# Altium PCB STM32-V5_PCB封装(PADS 2005).PcbDoc (part 1 of 2)
Units mil, origin at the board's own origin, x right, y up, seen from the top; angles counter-clockwise.
Board outline 7066.93 x 5511.81 mil, 2 copper layers (Top, BOTTOM), stack 4.02 mil thick; 397 components, 352 nets, 1643 pads, 387 vias.
Unrouted connection lines stored in the file: 1.
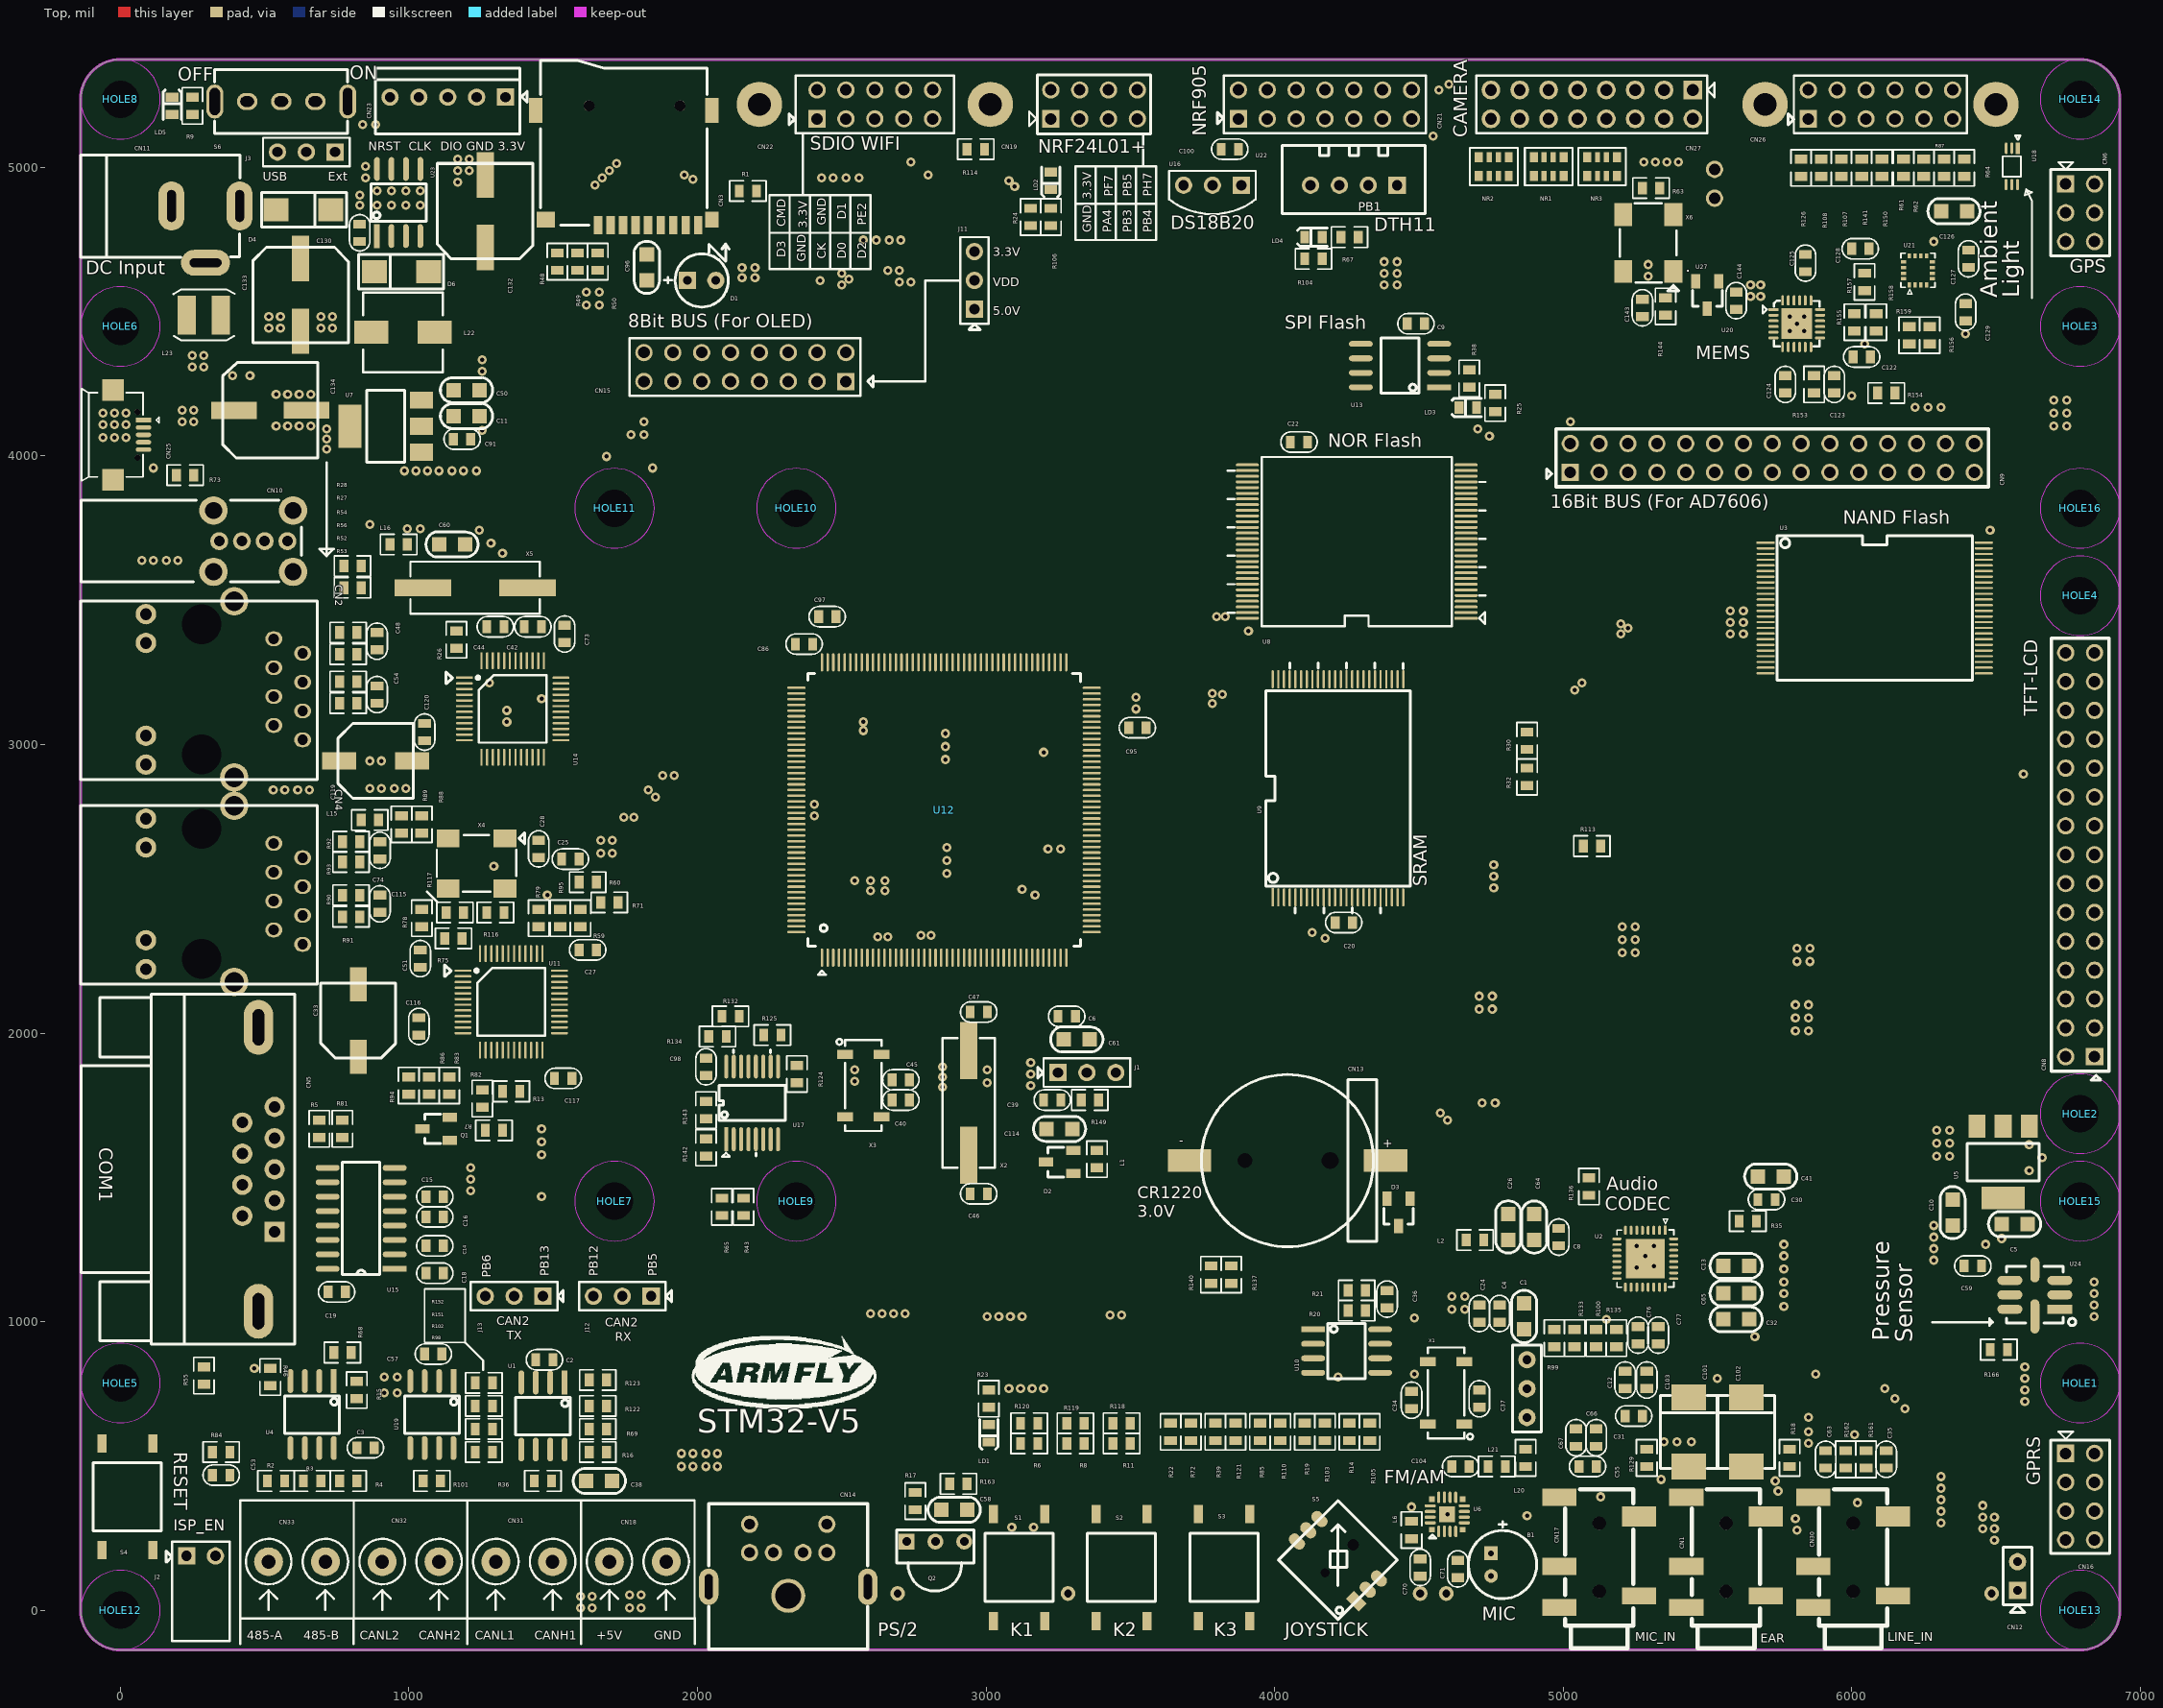
[diagram p0: Top view]
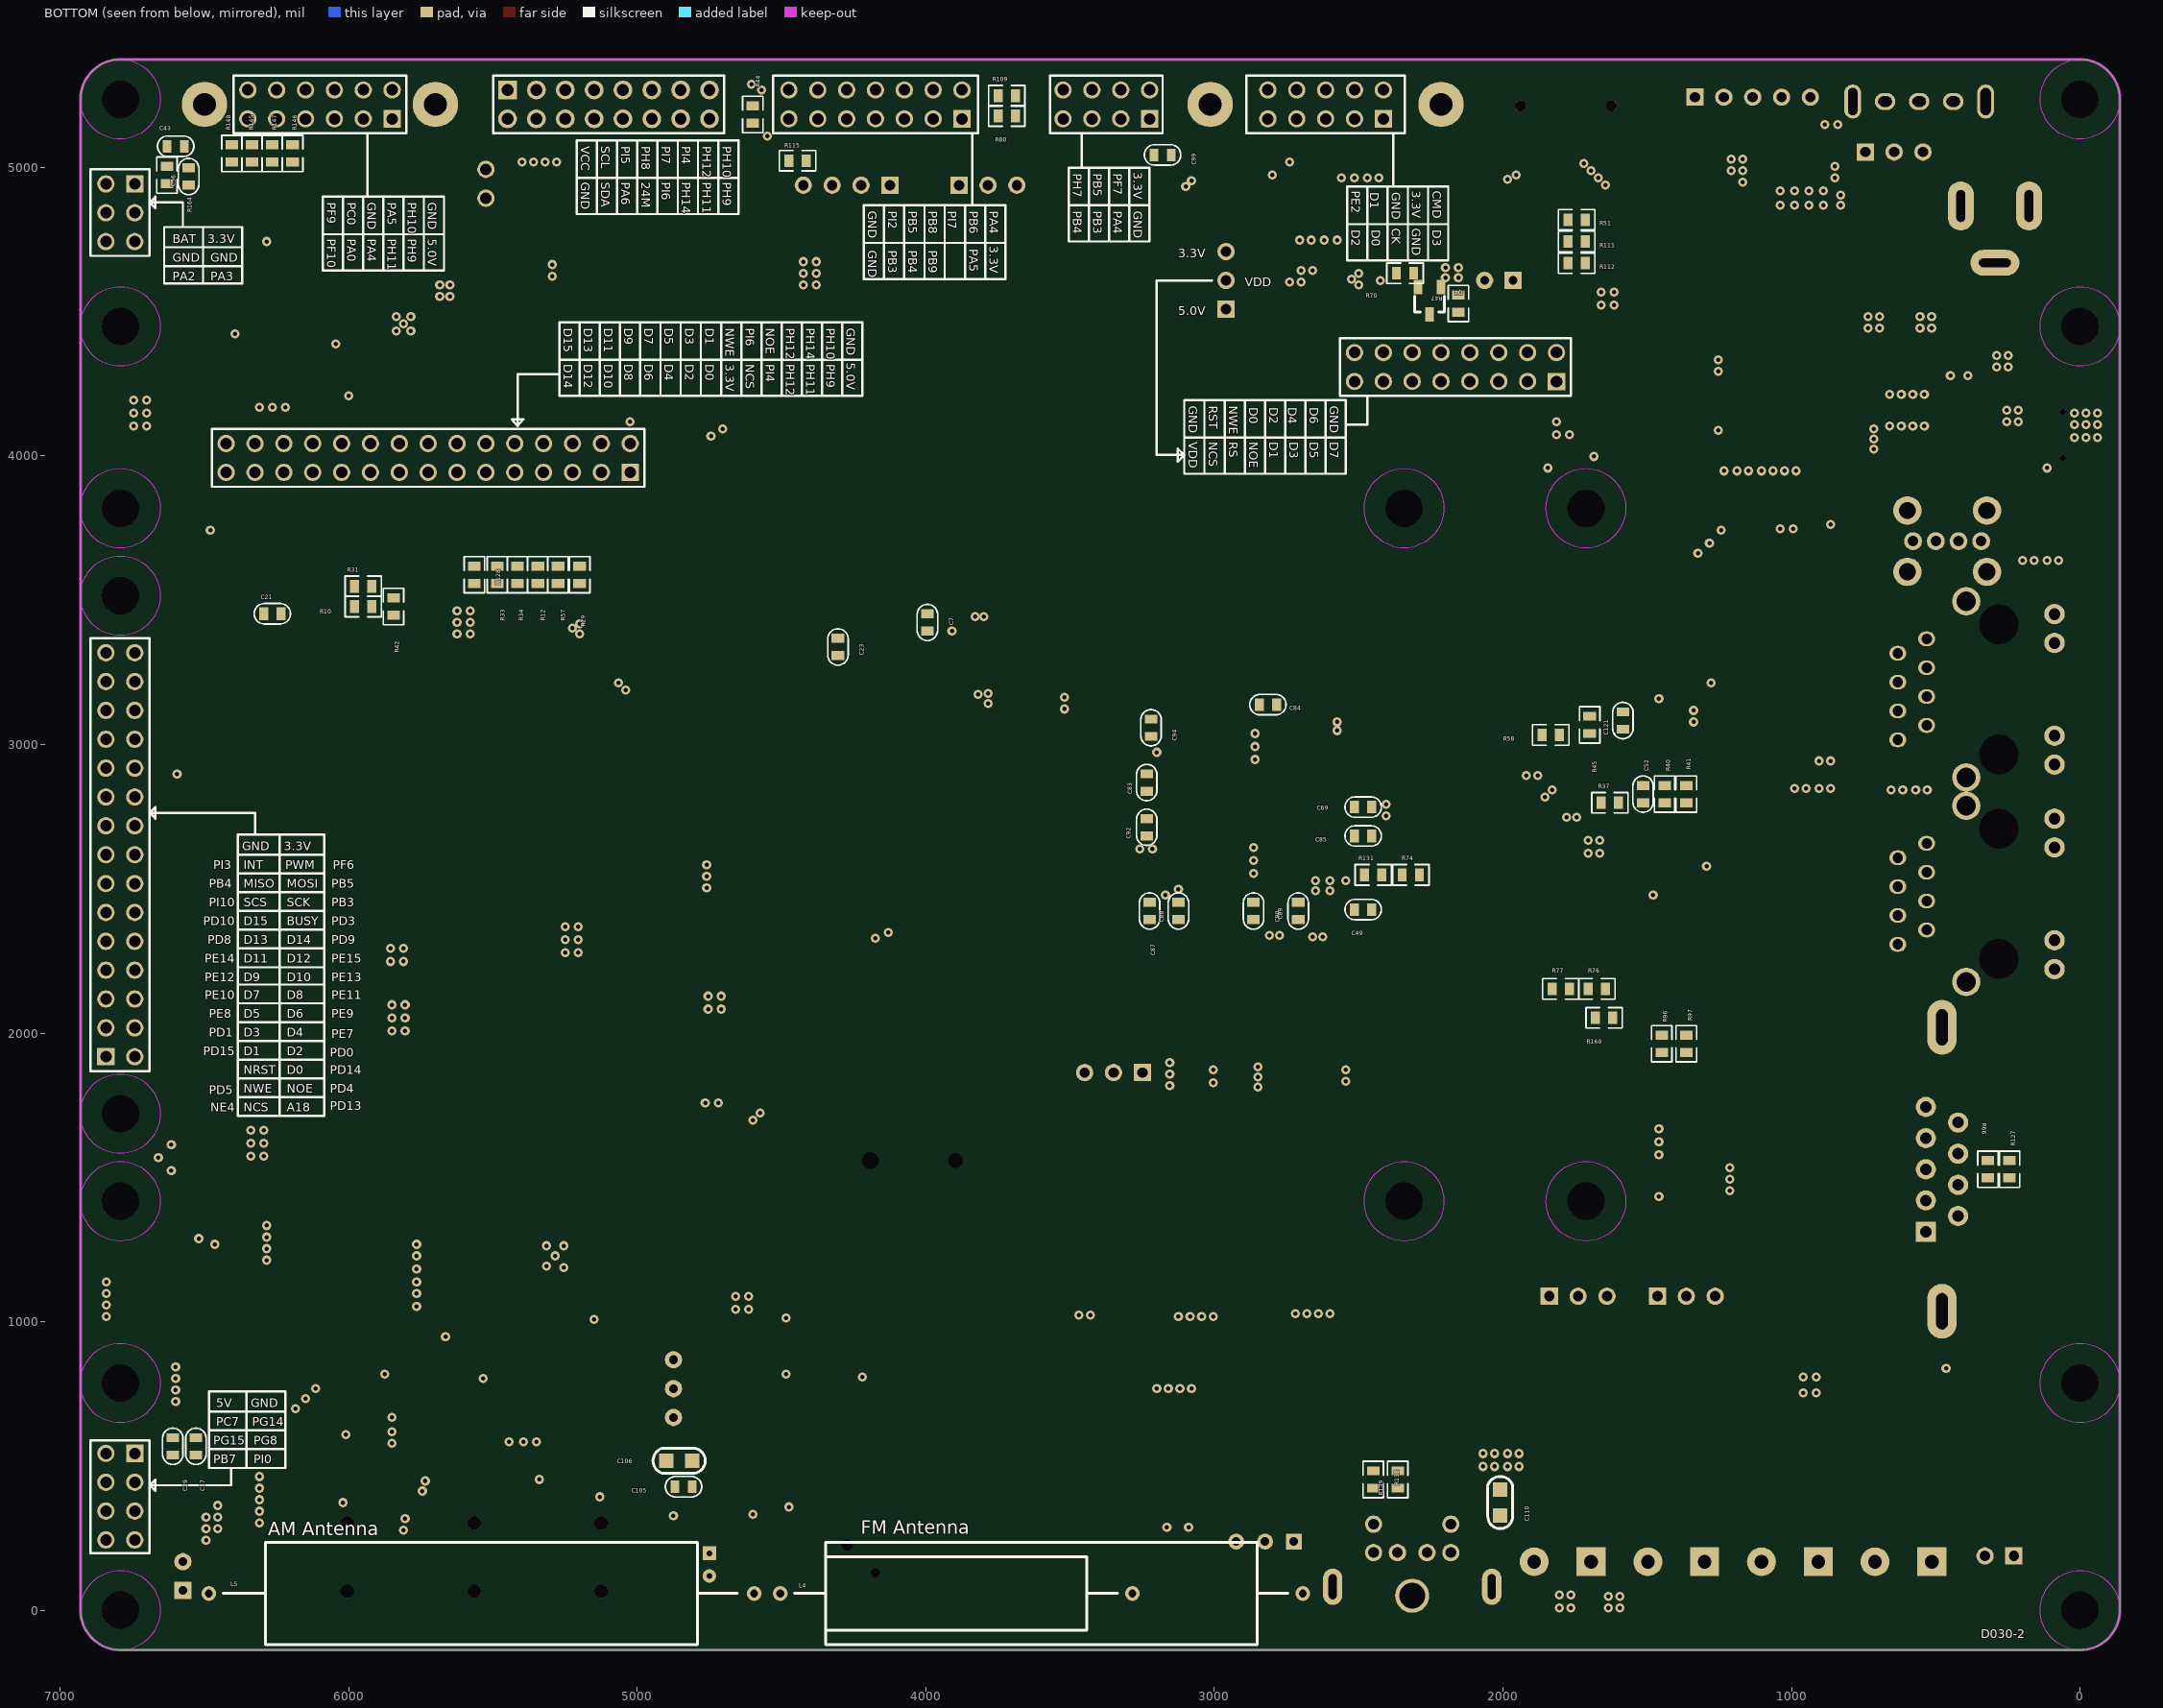
[diagram p1: BOTTOM view, seen from below]

## Layer stack, top to bottom
Solder Mask Top: solder mask 0.4, Solder Resist, Dk 3.5
Top: signal copper 0.41
Dielectric 1: dielectric 3.2, FR-4, Dk 4.3
BOTTOM: signal copper 0.41
Solder Mask Bottom: solder mask 0.4, Solder Resist, Dk 3.5

## Board outline
0,-137.8 6791.34,-137.8 ccw(c6791.34,0) 6929.13,0 6929.13,5236.22 ccw(c6791.34,5236.22) 6791.34,5374.02 0,5374.02 ccw(c0,5236.22) -137.8,5236.22 -137.8,0 ccw(c0,0)

## Design rules (kind name [scope] priority, off if disabled: settings)
Clearance "'Default' PADS rule_18" [All] p1: gap=12
Clearance "'Default' PADS rule_15" [IsVia vs IsVia] p2: gap=8
ComponentClearance "'Default' PADS rule_12" [All] p1: gap=1 collisioncheckmode=3 verticalgap=10 showdistances=FALSE
FlightTimeFalling "'Class' PADS rule_30" [InNetClass('XM1_DATA')] p1: maximum=10.00
FlightTimeFalling "'Class' PADS rule_23" [InNetClass('XM1_CONTROL')] p2: maximum=10.00
FlightTimeFalling "'Default' PADS rule_10" [All] p3: maximum=10.00
FlightTimeRising "'Class' PADS rule_29" [InNetClass('XM1_DATA')] p1: maximum=10.00
FlightTimeRising "'Class' PADS rule_22" [InNetClass('XM1_CONTROL')] p2: maximum=10.00
FlightTimeRising "'Default' PADS rule_9" [All] p3: maximum=10.00
Length "'Class' PADS rule_25" [InNetClass('XM1_DATA')] p1: maxlimit=700 minlimit=0
Length "'Class' PADS rule" [InNetClass('XM1_CONTROL')] p2: maxlimit=1000 minlimit=0
Length "'Default' PADS rule_5" [All] p3: maxlimit=50000 minlimit=0
MatchedLengths "'Class' PADS rule_31" [InNetClass('XM1_DATA')] p1: tolerance=25 checknetsindiffpair=TRUE checkdiffpairvsdiffpair=TRUE checkothers=TRUE
MatchedLengths "'Class' PADS rule_24" [InNetClass('XM1_CONTROL')] p2: tolerance=200 checknetsindiffpair=TRUE checkdiffpairvsdiffpair=TRUE checkothers=TRUE
MatchedLengths "'Default' PADS rule_11" [InNetClass('All Nets')] p3: tolerance=200 checknetsindiffpair=TRUE checkdiffpairvsdiffpair=TRUE checkothers=TRUE
MaxMinImpedance "'Class' PADS rule_28" [InNetClass('XM1_DATA')] p1: minimum=50.00 maximum=70.00
MaxMinImpedance "'Class' PADS rule_21" [InNetClass('XM1_CONTROL')] p2: minimum=50.00 maximum=150.0
MaxMinImpedance "'Default' PADS rule_8" [All] p3: minimum=50.00 maximum=150.0
ParallelSegment "'Class' PADS rule_27" [InNetClass('XM1_DATA')] p1: limit=1000 gap=200
ParallelSegment "'Class' PADS rule_26" [InNetClass('XM1_DATA')] p2: limit=1000 gap=200
ParallelSegment "'Class' PADS rule_20" [InNetClass('XM1_CONTROL')] p3: limit=1000 gap=200
ParallelSegment "'Class' PADS rule_19" [InNetClass('XM1_CONTROL')] p4: limit=1000 gap=200
ParallelSegment "'Default' PADS rule_7" [All] p5: limit=1000 gap=200
ParallelSegment "'Default' PADS rule_6" [All] p6: limit=1000 gap=200
PlaneClearance "'Default' PADS rule_14" [All] p1: clearance=12
PlaneConnect "Power Plane Connect Style - pads with no thermal_33" [(Name='HOLE3-1') Or (Name='HOLE4-1') Or (Name='HOLE5-1') Or (Name='HOLE6-1') Or (Name='HOLE7-1') Or (Name='HOLE8-1') Or (Name='HOLE9-1') Or (Name='J1-1') Or (Name='J1-3') Or (Name='L4-2') Or (Name='L4-3') Or (Name='S5-7') Or (Name='S5-8') Or (Name='S6-1') Or (Name='S6-3') Or (Name='S6-4') Or (Name='S6-5') Or (Name='U22-3')] p1: planeconnectstyle=NoConnect reliefexpansion=20 reliefentries=4 reliefconductorwidth=10 reliefairgap=10 // PAD - No Thermal Connect Rule
PlaneConnect "Power Plane Connect Style - pads with no thermal" [(Name='CN1-6') Or (Name='CN1-7') Or (Name='CN10-5') Or (Name='CN10-6') Or (Name='CN10-7') Or (Name='CN10-8') Or (Name='CN11-2') Or (Name='CN11-3') Or (Name='CN12-3') Or (Name='CN13-3') Or (Name='CN13-4') Or (Name='CN14-2') Or (Name='CN14-6') Or (Name='CN14-7') Or (Name='CN14-8') Or (Name='CN14-9') Or (Name='CN17-6') Or (Name='CN17-7') Or (Name='CN2-7') Or (Name='CN2-15') Or (Name='CN2-16') Or (Name='CN21-5') Or (Name='CN22-11') Or (Name='CN22-12') Or (Name='CN25-8') Or (Name='CN25-9') Or (Name='CN26-13') Or (Name='CN26-14') Or (Name='CN3-14') Or (Name='CN3-15') Or (Name='CN30-6') Or (Name='CN30-7') Or (Name='CN4-5') Or (Name='CN4-7') Or (Name='CN4-15') Or (Name='CN4-16') Or (Name='CN5-1') Or (Name='CN5-9') Or (Name='CN9-14') Or (Name='CN9-31') Or (Name='CN9-32') Or (Name='HOLE1-1') Or (Name='HOLE10-1') Or (Name='HOLE11-1') Or (Name='HOLE12-1') Or (Name='HOLE13-1') Or (Name='HOLE14-1') Or (Name='HOLE15-1') Or (Name='HOLE16-1') Or (Name='HOLE2-1')] p2: planeconnectstyle=NoConnect reliefexpansion=20 reliefentries=4 reliefconductorwidth=10 reliefairgap=10 // PAD - No Thermal Connect Rule
PlaneConnect "Power Plane Connect Style - Via from round thru-hole global defaults" [IsVia] p3: planeconnectstyle=Relief reliefexpansion=20 reliefentries=4 reliefconductorwidth=15 reliefairgap=10
PlaneConnect "Power Plane Connect Style - Round thru-hole pad from global defaults" [IsPad And OnMultiLayer And (PadShape_MidLayer1 = 'Round') And (PadXSize_MidLayer1 = PadYSize_MidLayer1)] p4: planeconnectstyle=Relief reliefexpansion=20 reliefentries=4 reliefconductorwidth=15 reliefairgap=10
PlaneConnect "Power Plane Connect Style - Square thru-hole pad from global defaults" [IsPad And OnMultiLayer And ((PadShape_MidLayer1 = 'Rectangular') Or (PadShape_MidLayer1 = 'Octagonal') Or (PadShape_MidLayer1 = 'Rounded Rectangle')) And (PadXSize_MidLayer1 = PadYSize_MidLayer1)] p5: planeconnectstyle=Relief reliefexpansion=20 reliefentries=4 reliefconductorwidth=15 reliefairgap=10
PlaneConnect "Power Plane Connect Style - Rect thru-hole pad from global defaults" [IsPad And OnMultiLayer And ((PadShape_MidLayer1 = 'Rectangular') Or (PadShape_MidLayer1 = 'Octagonal') Or (PadShape_MidLayer1 = 'Rounded Rectangle')) And (PadXSize_MidLayer1 <> PadYSize_MidLayer1)] p6: planeconnectstyle=Relief reliefexpansion=20 reliefentries=4 reliefconductorwidth=15 reliefairgap=10
PlaneConnect "Power Plane Connect Style - Square-rect thru-hole pad from global defaults" [IsPad And OnMultiLayer And (PadShape_MidLayer1 = 'Rounded Rectangle') And (PadXSize_MidLayer1 = PadYSize_MidLayer1) And (Pad_CornerRadius_MidLayer1 = '0%')] p7: planeconnectstyle=Relief reliefexpansion=20 reliefentries=4 reliefconductorwidth=15 reliefairgap=10
PlaneConnect "Power Plane Connect Style - Oval thru-hole pad from global defaults" [IsPad And OnMultiLayer And (PadShape_MidLayer1 = 'Round') And (PadXSize_MidLayer1 <> PadYSize_MidLayer1)] p8: planeconnectstyle=Relief reliefexpansion=20 reliefentries=4 reliefconductorwidth=15 reliefairgap=10
PlaneConnect "Power Plane Connect Style - Round-oval thru-hole pad from global defaults" [IsPad And OnMultiLayer And (PadShape_MidLayer1 = 'Rounded Rectangle') And (PadXSize_MidLayer1 = PadYSize_MidLayer1) And (Pad_CornerRadius_MidLayer1 = '100%')] p9: planeconnectstyle=Relief reliefexpansion=20 reliefentries=4 reliefconductorwidth=15 reliefairgap=10
PolygonConnect "Polygon Connect Style - BOTTOM Round SMD from global defaults" [IsSMTPin And (PadShape_BottomLayer = 'Round') And (PadXSize_BottomLayer = PADYSize_BottomLayer) vs Layer = 'BOTTOM'] p1: connectstyle=Relief reliefconductorwidth=10 reliefentries=4 polygonreliefangle="90 Angle" airgapwidth=10
PolygonConnect "Polygon Connect Style - Top Round SMD from global defaults" [IsSMTPin And (PadShape_TopLayer = 'Round') And (PadXSize_TopLayer = PADYSize_TopLayer) vs Layer = 'Top'] p2: connectstyle=Relief reliefconductorwidth=10 reliefentries=4 polygonreliefangle="90 Angle" airgapwidth=10
PolygonConnect "Polygon Connect Style - BOTTOM Square SMD from global defaults 1" [IsSMTPin And (PadShape_BottomLayer = 'Rectangular') And (PadXSize_BottomLayer = PADYSize_BottomLayer) vs Layer = 'BOTTOM'] p3: connectstyle=Relief reliefconductorwidth=10 reliefentries=4 polygonreliefangle="90 Angle" airgapwidth=10
PolygonConnect "Polygon Connect Style - BOTTOM Square SMD from global defaults 2" [IsSMTPin And (PadShape_BottomLayer = 'Octagonal') And (PadXSize_BottomLayer = PADYSize_BottomLayer) vs Layer = 'BOTTOM'] p4: connectstyle=Relief reliefconductorwidth=10 reliefentries=4 polygonreliefangle="90 Angle" airgapwidth=10
PolygonConnect "Polygon Connect Style - BOTTOM Square SMD from global defaults 3" [IsSMTPin And (PadShape_BottomLayer = 'Rounded Rectangle') And (PadXSize_BottomLayer = PADYSize_BottomLayer) vs Layer = 'BOTTOM'] p5: connectstyle=Relief reliefconductorwidth=10 reliefentries=4 polygonreliefangle="90 Angle" airgapwidth=10
PolygonConnect "Polygon Connect Style - Top Square SMD from global defaults 1" [IsSMTPin And (PadShape_TopLayer = 'Rectangular') And (PadXSize_TopLayer = PADYSize_TopLayer) vs Layer = 'Top'] p6: connectstyle=Relief reliefconductorwidth=10 reliefentries=4 polygonreliefangle="90 Angle" airgapwidth=10
PolygonConnect "Polygon Connect Style - Top Square SMD from global defaults 2" [IsSMTPin And (PadShape_TopLayer = 'Octagonal') And (PadXSize_TopLayer = PADYSize_TopLayer) vs Layer = 'Top'] p7: connectstyle=Relief reliefconductorwidth=10 reliefentries=4 polygonreliefangle="90 Angle" airgapwidth=10
PolygonConnect "Polygon Connect Style - Top Square SMD from global defaults 3" [IsSMTPin And (PadShape_TopLayer = 'Rounded Rectangle') And (PadXSize_TopLayer = PADYSize_TopLayer) vs Layer = 'Top'] p8: connectstyle=Relief reliefconductorwidth=10 reliefentries=4 polygonreliefangle="90 Angle" airgapwidth=10
PolygonConnect "Polygon Connect Style - BOTTOM Rect SMD from global defaults 1" [IsSMTPin And (PadShape_BottomLayer = 'Rectangular') And (PadXSize_BottomLayer <> PADYSize_BottomLayer) vs Layer = 'BOTTOM'] p9: connectstyle=Relief reliefconductorwidth=10 reliefentries=4 polygonreliefangle="90 Angle" airgapwidth=10
PolygonConnect "Polygon Connect Style - BOTTOM Rect SMD from global defaults 2" [IsSMTPin And (PadShape_BottomLayer = 'Octagonal') And (PadXSize_BottomLayer <> PADYSize_BottomLayer) vs Layer = 'BOTTOM'] p10: connectstyle=Relief reliefconductorwidth=10 reliefentries=4 polygonreliefangle="90 Angle" airgapwidth=10
PolygonConnect "Polygon Connect Style - BOTTOM Rect SMD from global defaults 3" [IsSMTPin And (PadShape_BottomLayer = 'Rounded Rectangle') And (PadXSize_BottomLayer <> PADYSize_BottomLayer) vs Layer = 'BOTTOM'] p11: connectstyle=Relief reliefconductorwidth=10 reliefentries=4 polygonreliefangle="90 Angle" airgapwidth=10
PolygonConnect "Polygon Connect Style - BOTTOM Square-rect SMD pad from global defaults" [IsSMTPin And (PadShape_BottomLayer = 'Rounded Rectangle') And (PadXSize_BottomLayer = PADYSize_BottomLayer) And (Pad_CornerRadius_BottomLayer = '0%') vs Layer = 'BOTTOM'] p12: connectstyle=Relief reliefconductorwidth=10 reliefentries=4 polygonreliefangle="90 Angle" airgapwidth=10
PolygonConnect "Polygon Connect Style - Top Rect SMD from global defaults 1" [IsSMTPin And (PadShape_TopLayer = 'Rectangular') And (PadXSize_TopLayer <> PADYSize_TopLayer) vs Layer = 'Top'] p13: connectstyle=Relief reliefconductorwidth=10 reliefentries=4 polygonreliefangle="90 Angle" airgapwidth=10
PolygonConnect "Polygon Connect Style - Top Rect SMD from global defaults 2" [IsSMTPin And (PadShape_TopLayer = 'Octagonal') And (PadXSize_TopLayer <> PADYSize_TopLayer) vs Layer = 'Top'] p14: connectstyle=Relief reliefconductorwidth=10 reliefentries=4 polygonreliefangle="90 Angle" airgapwidth=10
PolygonConnect "Polygon Connect Style - Top Rect SMD from global defaults 3" [IsSMTPin And (PadShape_TopLayer = 'Rounded Rectangle') And (PadXSize_TopLayer <> PADYSize_TopLayer) vs Layer = 'Top'] p15: connectstyle=Relief reliefconductorwidth=10 reliefentries=4 polygonreliefangle="90 Angle" airgapwidth=10
PolygonConnect "Polygon Connect Style - Top Square-rect SMD pad from global defaults" [IsSMTPin And (PadShape_TopLayer = 'Rounded Rectangle') And (PadXSize_TopLayer = PADYSize_TopLayer) And (Pad_CornerRadius_TopLayer = '0%') vs Layer = 'Top'] p16: connectstyle=Relief reliefconductorwidth=10 reliefentries=4 polygonreliefangle="90 Angle" airgapwidth=10
PolygonConnect "Polygon Connect Style - BOTTOM Oval SMD from global defaults" [IsSMTPin And (PadShape_BottomLayer = 'Round') And (PadXSize_BottomLayer <> PADYSize_BottomLayer) vs Layer = 'BOTTOM'] p17: connectstyle=Relief reliefconductorwidth=10 reliefentries=4 polygonreliefangle="90 Angle" airgapwidth=10
PolygonConnect "Polygon Connect Style - BOTTOM Round-oval SMD pad from global defaults" [IsSMTPin And (PadShape_BottomLayer = 'Rounded Rectangle') And (PadXSize_BottomLayer = PADYSize_BottomLayer) And (Pad_CornerRadius_BottomLayer = '100%') vs Layer = 'BOTTOM'] p18: connectstyle=Relief reliefconductorwidth=10 reliefentries=4 polygonreliefangle="90 Angle" airgapwidth=10
PolygonConnect "Polygon Connect Style - Top Oval SMD from global defaults" [IsSMTPin And (PadShape_TopLayer = 'Round') And (PadXSize_TopLayer <> PADYSize_TopLayer) vs Layer = 'Top'] p19: connectstyle=Relief reliefconductorwidth=10 reliefentries=4 polygonreliefangle="90 Angle" airgapwidth=10
PolygonConnect "Polygon Connect Style - Top Round-oval SMD pad from global defaults" [IsSMTPin And (PadShape_TopLayer = 'Rounded Rectangle') And (PadXSize_TopLayer = PADYSize_TopLayer) And (Pad_CornerRadius_TopLayer = '100%') vs Layer = 'Top'] p20: connectstyle=Relief reliefconductorwidth=10 reliefentries=4 polygonreliefangle="90 Angle" airgapwidth=10
PolygonConnect "Polygon Connect Style - Via from round thru-hole global defaults_32" [IsVia] p21: connectstyle=Relief reliefconductorwidth=15 reliefentries=4 polygonreliefangle="90 Angle" airgapwidth=10
PolygonConnect "Polygon Connect Style - BOTTOM Round thru-hole pad from global defaults" [IsPad And OnMultiLayer And (PadShape_BottomLayer = 'Round') And (PadXSize_BottomLayer = PADYSize_BottomLayer) vs Layer = 'BOTTOM'] p22: connectstyle=Relief reliefconductorwidth=15 reliefentries=4 polygonreliefangle="90 Angle" airgapwidth=10
PolygonConnect "Polygon Connect Style - Via from round thru-hole global defaults" [IsVia] p23: connectstyle=Relief reliefconductorwidth=15 reliefentries=4 polygonreliefangle="90 Angle" airgapwidth=10
PolygonConnect "Polygon Connect Style - Top Round thru-hole pad from global defaults" [IsPad And OnMultiLayer And (PadShape_TopLayer = 'Round') And (PadXSize_TopLayer = PADYSize_TopLayer) vs Layer = 'Top'] p24: connectstyle=Relief reliefconductorwidth=15 reliefentries=4 polygonreliefangle="90 Angle" airgapwidth=10
PolygonConnect "Polygon Connect Style - BOTTOM Square thru-hole pad from global defaults" [IsPad And OnMultiLayer And ((PadShape_BottomLayer = 'Rectangular') Or (PadShape_BottomLayer = 'Octagonal') Or (PadShape_BottomLayer = 'Rounded Rectangle')) And (PadXSize_BottomLayer = PADYSize_BottomLayer) vs Layer = 'BOTTOM'] p25: connectstyle=Relief reliefconductorwidth=15 reliefentries=4 polygonreliefangle="90 Angle" airgapwidth=10
PolygonConnect "Polygon Connect Style - Top Square thru-hole pad from global defaults" [IsPad And OnMultiLayer And ((PadShape_TopLayer = 'Rectangular') Or (PadShape_TopLayer = 'Octagonal') Or (PadShape_TopLayer = 'Rounded Rectangle')) And (PadXSize_TopLayer = PADYSize_TopLayer) vs Layer = 'Top'] p26: connectstyle=Relief reliefconductorwidth=15 reliefentries=4 polygonreliefangle="90 Angle" airgapwidth=10
PolygonConnect "Polygon Connect Style - BOTTOM Rect thru-hole pad from global defaults" [IsPad And OnMultiLayer And ((PadShape_BottomLayer = 'Rectangular') Or (PadShape_BottomLayer = 'Octagonal') Or (PadShape_BottomLayer = 'Rounded Rectangle')) And (PadXSize_BottomLayer <> PADYSize_BottomLayer) vs Layer = 'BOTTOM'] p27: connectstyle=Relief reliefconductorwidth=15 reliefentries=4 polygonreliefangle="90 Angle" airgapwidth=10
PolygonConnect "Polygon Connect Style - BOTTOM Square-rect thru-hole pad from global defaults" [IsPad And OnMultiLayer And (PadShape_BottomLayer = 'Rounded Rectangle') And (PadXSize_BottomLayer = PADYSize_BottomLayer) And (Pad_CornerRadius_BottomLayer = '0%') vs Layer = 'BOTTOM'] p28: connectstyle=Relief reliefconductorwidth=15 reliefentries=4 polygonreliefangle="90 Angle" airgapwidth=10
PolygonConnect "Polygon Connect Style - Top Rect thru-hole pad from global defaults" [IsPad And OnMultiLayer And ((PadShape_TopLayer = 'Rectangular') Or (PadShape_TopLayer = 'Octagonal') Or (PadShape_TopLayer = 'Rounded Rectangle')) And (PadXSize_TopLayer <> PADYSize_TopLayer) vs Layer = 'Top'] p29: connectstyle=Relief reliefconductorwidth=15 reliefentries=4 polygonreliefangle="90 Angle" airgapwidth=10
PolygonConnect "Polygon Connect Style - Top Square-rect thru-hole pad from global defaults" [IsPad And OnMultiLayer And (PadShape_TopLayer = 'Rounded Rectangle') And (PadXSize_TopLayer = PADYSize_TopLayer) And (Pad_CornerRadius_TopLayer = '0%') vs Layer = 'Top'] p30: connectstyle=Relief reliefconductorwidth=15 reliefentries=4 polygonreliefangle="90 Angle" airgapwidth=10
PolygonConnect "Polygon Connect Style - BOTTOM Oval thru-hole pad from global defaults" [IsPad And OnMultiLayer And (PadShape_BottomLayer = 'Round') And (PadXSize_BottomLayer <> PADYSize_BottomLayer) vs Layer = 'BOTTOM'] p31: connectstyle=Relief reliefconductorwidth=15 reliefentries=4 polygonreliefangle="90 Angle" airgapwidth=10
PolygonConnect "Polygon Connect Style - BOTTOM Round-oval thru-hole pad from global defaults" [IsPad And OnMultiLayer And (PadShape_BottomLayer = 'Rounded Rectangle') And (PadXSize_BottomLayer = PADYSize_BottomLayer) And (Pad_CornerRadius_BottomLayer = '100%') vs Layer = 'BOTTOM'] p32: connectstyle=Relief reliefconductorwidth=15 reliefentries=4 polygonreliefangle="90 Angle" airgapwidth=10
PolygonConnect "Polygon Connect Style - Top Oval thru-hole pad from global defaults" [IsPad And OnMultiLayer And (PadShape_TopLayer = 'Round') And (PadXSize_TopLayer <> PADYSize_TopLayer) vs Layer = 'Top'] p33: connectstyle=Relief reliefconductorwidth=15 reliefentries=4 polygonreliefangle="90 Angle" airgapwidth=10
PolygonConnect "Polygon Connect Style - Top Round-oval thru-hole pad from global defaults" [IsPad And OnMultiLayer And (PadShape_TopLayer = 'Rounded Rectangle') And (PadXSize_TopLayer = PADYSize_TopLayer) And (Pad_CornerRadius_TopLayer = '100%') vs Layer = 'Top'] p34: connectstyle=Relief reliefconductorwidth=15 reliefentries=4 polygonreliefangle="90 Angle" airgapwidth=10
PolygonConnect [All] p35: connectstyle=Relief reliefconductorwidth=10 reliefentries=4 polygonreliefangle="90 Angle" airgapwidth=10
RoutingLayers "'Default' PADS rule_3" [All] p1: top layer_v5=TRUE bottom layer_v5=TRUE
RoutingPriority "'Default' PADS rule_2" [All] p1: routingpriority=3
RoutingTopology "'Default' PADS rule" [All] p1: topology=Shortest
RoutingVias "'Default' PADS rule_4" [All] p1: holewidth=20 width=50 viastyle="Through Hole" minholewidth=20 minwidth=50 maxholewidth=20 maxwidth=50
SMDToCorner "'Default' PADS rule_16" [All] p1: distance=80000
SMDToPlane "'Default' PADS rule_17" [All] p1: distance=80000
SolderMaskExpansion "Solder Mask Expansion from CAM settings" [All] p1: expansion=2
Width "'Default' PADS rule_13" [All] p1: maxlimit=100 minlimit=5 preferedwidth=8
23 further rules are at their usual default settings.

## Classes and differential pairs
net class SDIO: PC8/SDIO_D0 PC9/SDIO_D1 PC10/SDIO_D2 PC11/SDIO_D3 PC12/SDIO_CK PD2/SDIO_CMD
net class FSMC_DATA: PD0/FSMC_D2 PD1/FSMC_D3 PD8/FSMC_D13 PD9/FSMC_D14 PD10/FSMC_D15 PD14/FSMC_D0 PD15/FSMC_D1 PE7/FSMC_D4 PE8/FSMC_D5 PE9/FSMC_D6 PE10/FSMC_D7 PE11/FSMC_D8 PE12/FSMC_D9 PE13/FSMC_D10 PE14/FSMC_D11 PE15/FSMC_D12
net class FSMC_ADDR: PD4/FSMC_NOE PD5/FSMC_NWE PD11/FSMC_CLE/FSMC_A16 PD12/FSMC_ALE/FSMC_A17 PD13/FSMC_A18 PE0/FSMC_NBL0 PE1/FSMC_NBL1 PE2/FSMC_A23/SD_DETECT PE3/FSMC_A19 PE4/FSMC_A20 PE5/FSMC_A21 PE6/FSMC_A22 PF0/FSMC_A0 PF1/FSMC_A1 PF2/FSMC_A2 PF3/FSMC_A3 PF4/FSMC_A4 PF5/FSMC_A5 PF12/FSMC_A6 PF13/FSMC_A7 PF14/FSMC_A8 PF15/FSMC_A9 PG0/FSMC_A10 PG1/FSMC_A11 PG2/FSMC_A12 PG3/FSMC_A13 PG4/FSMC_A14 PG5/FSMC_A15 PG6/FSMC_INT2 PG9/FSMC_NE2 PG10/FSMC_NE3 PG12/FSMC_NE4 PG13/FSMC_A24/ETH_RMII_TXD0
net class DCMI: PA6/DCMI_PIXCLK PH8/DCMI_HSYNC PH9/DCMI_D0/AD7606_OS0 PH10/DCMI_D1/AD7606_OS1 PH11/DCMI_D2/AD7606_OS2 PH12/DCMI_D3/AD7606_CONVST PH14/DCMI_D4/AD7606_RAGE PI4/DCMI_D5/AD7606_RESET PI5/DCMI_VSYNC PI6/DCMI_D6/AD7606_BUSY PI7/DCMI_D7/NRF905_CD

## Components (designator, comment, footprint, x,y, rotation, side; value= is the part's Value field where it differs from the comment)
B1 "B-MIC-6MM" B-MIC-6MM 4789.41,158.11 r270 top
C1 "0805/A-JL" 0805/A-JL 4864.41,1018.11 r90 top
C2 "0603/A-JL" 0603/A-JL 1469.41,868.11 r0 top
C3 "0603/A-JL" 0603/A-JL 849.41,563.11 r0 top
C4 "0603/A-JL" 0603/A-JL 4779.41,1028.11 r90 top
C5 "0805/A-JL" 0805/A-JL 6564.41,1338.11 r180 top
C6 "0603/A-JL" 0603/A-JL 3279.41,2058.11 r0 top
C7 "0603/A-JL" 0603/A-JL 3994.41,3423.11 r270 bottom
C8 "0603/A-JL" 0603/A-JL 4984.41,1293.11 r270 top
C9 "0603/A-JL" 0603/A-JL 4489.41,4458.11 r180 top
C10 "0805/A-JL" 0805/A-JL 6349.41,1378.11 r270 top
C11 "0805/A-JL" 0805/A-JL 1199.41,4138.11 r0 top
C12 "0603/A-JL" 0603/A-JL 5214.41,798.11 r270 top
C13 "0805/A-JL" 0805/A-JL 5599.41,1193.11 r180 top
C14 "0603/A-JL" 0603/A-JL 1089.41,1263.11 r180 top
C15 "0603/A-JL" 0603/A-JL 1089.41,1433.11 r180 top
C16 "0603/A-JL" 0603/A-JL 1089.41,1363.11 r0 top
C17 "0603/A-JL" 0603/A-JL 6529.41,568.11 r90 bottom
C18 "0603/A-JL" 0603/A-JL 1089.41,1168.11 r0 top
C19 "0603/A-JL" 0603/A-JL 749.41,1103.11 r180 top
C20 "0603/A-JL" 0603/A-JL 4239.41,2383.11 r180 top
C21 "0603/A-JL" 0603/A-JL 6264.41,3453.11 r180 bottom
C22 "0603/A-JL" 0603/A-JL 4084.41,4048.11 r0 top
C23 "0603/A-JL" 0603/A-JL 4304.41,3338.11 r90 bottom
C24 "0603/A-JL" 0603/A-JL 4709.41,1028.11 r90 top
C25 "0603/A-JL" 0603/A-JL 1559.41,2603.11 r0 top
C26 "0805/A-JL" 0805/A-JL 4809.41,1328.11 r90 top
C27 "0603/A-JL" 0603/A-JL 1619.41,2288.11 r0 top
C28 "0603/A-JL" 0603/A-JL 1449.41,2638.11 r270 top
C29 "0603/A-JL" 0603/A-JL 6609.41,568.11 r90 bottom
C30 "0603/A-JL" 0603/A-JL 5704.41,1423.11 r180 top
C31 "0603/A-JL" 0603/A-JL 5244.41,673.11 r0 top
C32 "0805/A-JL" 0805/A-JL 5599.41,1008.11 r180 top
C33 "C-6.6X6.6MM" C-6.6X6.6MM 824.41,2043.11 r90 top
C34 "0603/A-JL" 0603/A-JL 4474.41,728.11 r270 top
C35 "0603/A-JL" 0603/A-JL 6119.41,523.11 r270 top
C36 "0603/A-JL" 0603/A-JL 4389.41,1078.11 r270 top
C37 "0603/A-JL" 0603/A-JL 4709.41,733.11 r270 top
C38 "0805/A-JL" 0805/A-JL 1659.41,448.11 r0 top
C39 "0603/A-JL" 0603/A-JL 3229.41,1768.11 r0 top
C40 "0603/A-JL" 0603/A-JL 2704.41,1768.11 r180 top
C41 "0805/A-JL" 0805/A-JL 5719.41,1503.11 r180 top
C42 "0603/A-JL" 0603/A-JL 1429.41,3408.11 r180 top
C43 "0603/A-JL" 0603/A-JL 6599.41,5073.11 r0 bottom
C44 "0603/A-JL" 0603/A-JL 1299.41,3408.11 r0 top
C45 "0603/A-JL" 0603/A-JL 2704.41,1838.11 r180 top
C46 "0603/A-JL" 0603/A-JL 2974.41,1443.11 r180 top
C47 "0603/A-JL" 0603/A-JL 2974.41,2073.11 r180 top
C48 "0603/A-JL" 0603/A-JL 889.41,3358.11 r90 top
C49 "0603/A-JL" 0603/A-JL 2484.41,2428.11 r180 bottom
C50 "0805/A-JL" 0805/A-JL 1199.41,4228.11 r0 top
C51 "0603/A-JL" 0603/A-JL 1039.41,2258.11 r90 top
C52 "0603/A-JL" 0603/A-JL 1514.41,2828.11 r90 bottom
C53 "0603/A-JL" 0603/A-JL 349.41,468.11 r180 top
C54 "0603/A-JL" 0603/A-JL 889.41,3173.11 r270 top
C55 "0603/A-JL" 0603/A-JL 5084.41,498.11 r180 top
C56 "0603/A-JL" 0603/A-JL 6554.41,4968.11 r90 bottom
C57 "0603/A-JL" 0603/A-JL 1084.41,888.11 r0 top
C58 "0805/A-JL" 0805/A-JL 2889.41,348.11 r0 top
C59 "0603/A-JL" 0603/A-JL 6419.41,1193.11 r0 top
C60 "0805/A-JL" 0805/A-JL 1149.41,3693.11 r180 top
C61 "0805/A-JL" 0805/A-JL 3314.41,1978.11 r180 top
C63 "0603/A-JL" 0603/A-JL 5909.41,523.11 r270 top
C64 "0805/A-JL" 0805/A-JL 4899.41,1328.11 r270 top
C65 "0805/A-JL" 0805/A-JL 5599.41,1098.11 r180 top
C66 "0603/A-JL" 0603/A-JL 5114.41,598.11 r270 top
C67 "0603/A-JL" 0603/A-JL 5044.41,598.11 r270 top
C69 "0603/A-JL" 0603/A-JL 2484.41,2783.11 r180 bottom
C70 "0603/A-JL" 0603/A-JL 4504.41,148.11 r90 top
C71 "0603/A-JL" 0603/A-JL 4634.41,143.11 r90 top
C73 "0603/A-JL" 0603/A-JL 1539.41,3383.11 r90 top
C74 "0603/A-JL" 0603/A-JL 899.41,2633.11 r90 top
C76 "0603/A-JL" 0603/A-JL 5259.41,953.11 r270 top
C77 "0603/A-JL" 0603/A-JL 5329.41,953.11 r270 top
C83 "0603/A-JL" 0603/A-JL 3234.41,2868.11 r270 bottom
C84 "0603/A-JL" 0603/A-JL 2814.41,3138.11 r180 bottom
C85 "0603/A-JL" 0603/A-JL 2484.41,2683.11 r180 bottom
C86 "0603/A-JL" 0603/A-JL 2369.41,3348.11 r0 top
C87 "0603/A-JL" 0603/A-JL 3224.41,2423.11 r90 bottom
C88 "0603/A-JL" 0603/A-JL 3124.41,2423.11 r90 bottom
C89 "0603/A-JL" 0603/A-JL 2709.41,2423.11 r90 bottom
C90 "0603/A-JL" 0603/A-JL 2864.41,2423.11 r90 bottom
C91 "0603/A-JL" 0603/A-JL 1184.41,4058.11 r180 top
C92 "0603/A-JL" 0603/A-JL 3234.41,2713.11 r90 bottom
C94 "0603/A-JL" 0603/A-JL 3219.41,3058.11 r270 bottom
C95 "0603/A-JL" 0603/A-JL 3524.41,3058.11 r180 top
C96 "0805/A-JL" 0805/A-JL 1824.41,4653.11 r90 top
C97 "0603/A-JL" 0603/A-JL 2449.41,3443.11 r180 top
C98 "0603/A-JL" 0603/A-JL 2029.41,1883.11 r270 top
C99 "0603/A-JL" 0603/A-JL 3179.41,5043.11 r180 bottom
C100 "0603/A-JL" 0603/A-JL 3844.41,5063.11 r180 top
C101 "6032C-JL" 6032C-JL 5434.41,618.11 r90 top
C102 "6032C-JL" 6032C-JL 5634.41,618.11 r90 top
C103 "0603/A-JL" 0603/A-JL 5289.41,798.11 r270 top
C104 "0603/A-JL" 0603/A-JL 4644.41,498.11 r0 top
C105 "0603/A-JL" 0603/A-JL 4839.41,428.11 r180 bottom
C106 "0805/A-JL" 0805/A-JL 4854.41,518.11 r0 bottom
C110 "0805/A-JL" 0805/A-JL 2009.41,373.11 r90 bottom
C114 "C-0805" C-0805 3254.41,1668.11 r0 top
C115 "0603/A-JL" 0603/A-JL 899.41,2448.11 r90 top
C116 "0603/A-JL" 0603/A-JL 1034.41,2023.11 r90 top
C117 "0603/A-JL" 0603/A-JL 1534.41,1843.11 r0 top
C119 "C-6.6X6.6MM" C-6.6X6.6MM 884.41,2943.11 r0 top
C120 "0603/A-JL" 0603/A-JL 1054.41,3043.11 r270 top
C121 "0603/A-JL" 0603/A-JL 1584.41,3083.11 r270 bottom
C122 "0603/A-JL" 0603/A-JL 6034.41,4343.11 r180 top
C123 "0603/A-JL" 0603/A-JL 5939.41,4248.11 r90 top
C124 "0603/A-JL" 0603/A-JL 5769.41,4248.11 r90 top
C125 "0603/A-JL" 0603/A-JL 5839.41,4668.11 r90 top
C126 "0805/A-JL" 0805/A-JL 6354.41,4848.11 r180 top
C127 "0603/A-JL" 0603/A-JL 6404.41,4683.11 r90 top
C128 "0603/A-JL" 0603/A-JL 6029.41,4718.11 r180 top
C129 "0603/A-JL" 0603/A-JL 6394.41,4498.11 r90 top
C130 "0603/A-JL" 0603/A-JL 829.41,4773.11 r270 top
C132 "C-8.4X8.4MM" C-8.4X8.4MM 1264.41,4848.11 r90 top
C133 "C-8.4X8.4MM" C-8.4X8.4MM 624.41,4558.11 r270 top
C134 "C-8.4X8.4MM" C-8.4X8.4MM 519.41,4158.11 r0 top
C143 "0603/A-JL" 0603/A-JL 5274.41,4513.11 r90 top
C144 "0603/A-JL" 0603/A-JL 5599.41,4538.11 r270 top
CN1 "CON-PJ327A/SB-JL" CON-PJ327A/SB-JL 5564.41,193.11 r90 top
CN2 "CON-HR911105C/RJ45/SC-JL" CON-HR911105C/RJ45/SC-JL 531.5,3366.14 r270 top
CN3 "CON-TFCARD/AUTO-EJECT" CON-TFCARD/AUTO-EJECT 1939.41,5213.11 r180 top
CN4 "CON-HR911105C/RJ45/SC-JL" CON-HR911105C/RJ45/SC-JL 531.5,2657.48 r270 top
CN5 "CON-JH-9P/SC/R-JL" CON-JH-9P/SC/R-JL 534.41,1528.11 r270 top
CN6 "MODULE-GPS/2X3P/2.54MM/TC" MODULE-GPS/2X3P/2.54MM/TC 6791.34,4842.52 r270 top
CN8 "CON-30P(2X15)/MAIN/2.54MM/TC" CON-30P(2X15)/MAIN/2.54MM/TC 6791.34,2618.11 r90 top
CN9 "MODULE-AD7606/30P(2X15)/2.54MM/TC" MODULE-AD7606/30P(2X15)/2.54MM/TC 5724.41,3993.11 r0 top
CN10 "CON-USB-A-4P(SIDE)" CON-USB-A-4P(SIDE) 460.63,3704.72 r180 top
CN11 "CON-DS210/SC/3-JL" CON-DS210/SC/3-JL 413.39,4866.14 r180 top
CN12 "MODULE-AW8733" MODULE-AW8733 5724.41,468.11 r0 top
CN13 "BAT-CEDN" BAT-CEDN 4044.41,1558.11 r0 top
CN14 "CON-PS/2" CON-PS/2 2314.41,298.11 r0 top
CN15 "CON-8X2P/2.54/TC/OLED" CON-8X2P/2.54/TC/OLED 2164.41,4308.11 r0 top
CN16 "MODULE-MG323/2X4P/2.54MM/TC" MODULE-MG323/2X4P/2.54MM/TC 6791.34,393.7 r270 top
CN17 "CON-PJ327A/SB-JL" CON-PJ327A/SB-JL 5124.41,193.11 r90 top
CN18 "CON-KF128-2P/5.0/TC" CON-KF128-2P/5.0/TC 1793.11,168.11 r0 top
CN19 "MODULE-NRF24L01/2X4P/2.54MM/TC" MODULE-NRF24L01/2X4P/2.54MM/TC 3224.41,5168.11 r0 top
CN21 "MODULE-NRF905/14P(2X7)/2.54/TC" MODULE-NRF905/14P(2X7)/2.54/TC 4174.41,5168.11 r0 top
CN22 "MODULE-WIFI/88W8686/10P/2.54MM(PAI-MU)" MODULE-WIFI/88W8686/10P/2.54MM(PAI-MU) 2614.41,5168.11 r0 top
CN23 "CON-KF2510/5P/2.54MM/TC" CON-KF2510/5P/2.54MM/TC 1134.41,5243.11 r0 top
CN25 "CON-MICRO-USB-B/5P" CON-MICRO-USB-B/5P 59.41,4073.11 r0 top
CN26 "CON-RF-6X2P/2.54/TC(F4-DSO)" CON-RF-6X2P/2.54/TC(F4-DSO) 6099.41,5168.11 r0 top
CN27 "MODULE-CAMMER/16P(2X8)/2.54/TC" MODULE-CAMMER/16P(2X8)/2.54/TC 5449.41,5268.11 r180 top
CN30 "CON-PJ327A/SB-JL" CON-PJ327A/SB-JL 6004.41,193.11 r90 top
CN31 "CON-KF128-2P/5.0/TC" CON-KF128-2P/5.0/TC 1399.41,168.11 r0 top
CN32 "CON-KF128-2P/5.0/TC" CON-KF128-2P/5.0/TC 1005.71,168.11 r0 top
CN33 "CON-KF128-2P/5.0/TC" CON-KF128-2P/5.0/TC 612.01,168.11 r0 top
D1 "Q-红外发射-04/C-JL" Q-红外发射-04/C-JL 2014.41,4608.11 r90 top
D2 "SOT23-JL" SOT23-JL 3254.41,1553.11 r0 top
D3 "SOT23-JL" SOT23-JL 4429.41,1378.11 r90 top
D4 "SOD106-JL" SOD106-JL 634.41,4853.11 r180 top
D6 "SOD106-JL" SOD106-JL 974.41,4638.11 r0 top
HOLE1 "安装HOLE-3-JL" 安装HOLE-3-JL 6791.34,787.4 r0 top
HOLE2 "安装HOLE-3-JL" 安装HOLE-3-JL 6791.34,1720.47 r0 top
HOLE3 "安装HOLE-3-JL" 安装HOLE-3-JL 6791.34,4448.82 r0 top
HOLE4 "安装HOLE-3-JL" 安装HOLE-3-JL 6791.34,3515.75 r0 top
HOLE5 "安装HOLE-3-JL" 安装HOLE-3-JL 0,787.4 r0 top
HOLE6 "安装HOLE-3-JL" 安装HOLE-3-JL 0,4448.82 r0 top
HOLE7 "安装HOLE-3-JL" 安装HOLE-3-JL 1712.6,1417.32 r0 top
HOLE8 "安装HOLE-3-JL" 安装HOLE-3-JL 0,5236.22 r0 top
HOLE9 "安装HOLE-3-JL" 安装HOLE-3-JL 2342.52,1417.32 r0 top
HOLE10 "安装HOLE-3-JL" 安装HOLE-3-JL 2342.52,3818.9 r0 top
HOLE11 "安装HOLE-3-JL" 安装HOLE-3-JL 1712.6,3818.9 r0 top
HOLE12 "安装HOLE-3-JL" 安装HOLE-3-JL 0,0 r0 top
HOLE13 "安装HOLE-3-JL" 安装HOLE-3-JL 6791.34,0 r0 top
HOLE14 "安装HOLE-3-JL" 安装HOLE-3-JL 6791.34,5236.22 r0 top
HOLE15 "安装HOLE-3-JL" 安装HOLE-3-JL 6791.34,1417.32 r0 top
HOLE16 "安装HOLE-3-JL" 安装HOLE-3-JL 6791.34,3818.9 r0 top
J1 "CON-RE-3P/2.54/TC" CON-RE-3P/2.54/TC 3249.41,1863.11 r0 top
J2 "CON-2P/2.54/SC" CON-2P/2.54/SC 229.41,188.11 r0 top
J3 "CON-RE-3P/2.54/TCA" CON-RE-3P/2.54/TCA 744.41,5053.11 r180 top
J11 "CON-RE-3P/2.54/TC" CON-RE-3P/2.54/TC 2959.41,4508.11 r90 top
J12 "CON-RE-3P/2.54/TC" CON-RE-3P/2.54/TC 1839.41,1088.11 r180 top
J13 "CON-RE-3P/2.54/TC" CON-RE-3P/2.54/TC 1464.41,1088.11 r180 top
L1 "0603-JL" 0603-JL 3384.41,1563.11 r90 top
L2 "0603-JL" 0603-JL 4694.41,1283.11 r0 top
L4 "ANT-FM(23X5)" ANT-FM(23X5) 4504.41,58.11 r180 bottom
L5 "ANT-38X8X5.5" ANT-38X8X5.5 6484.41,58.11 r180 bottom
L6 "0603-JL" 0603-JL 4474.41,278.11 r90 top
L15 "0603-JL" 0603-JL 864.41,2738.11 r0 top
L16 "0603-JL" 0603-JL 964.41,3693.11 r0 top
L20 "0603-JL" 0603-JL 4869.41,528.11 r90 top
L21 "0603-JL" 0603-JL 4769.41,498.11 r180 top
L22 "L-SMT-7X7" L-SMT-7X7 979.41,4428.11 r180 top
L23 "L-3530/B-JL" L-3530/B-JL 289.41,4488.11 r180 top
LD1 "LED-0603/AI-JL" LED-0603/AI-JL 3009.41,613.11 r270 top
LD2 "LED-0603/AI-JL" LED-0603/AI-JL 3224.41,4953.11 r270 top
LD3 "LED-0603/AI-JL" LED-0603/AI-JL 4669.41,4168.11 r180 top
LD4 "LED-0603/AI-JL" LED-0603/AI-JL 4134.41,4758.11 r180 top
LD5 "LED-0603/AI-JL" LED-0603/AI-JL 179.41,5213.11 r90 top
NR1 "NR-0603N-JL" NR-0603N-JL 4949.41,5003.11 r180 top
NR2 "NR-0603N-JL" NR-0603N-JL 4759.41,5003.11 r180 top
NR3 "NR-0603N-JL" NR-0603N-JL 5134.41,5003.11 r180 top
Q1 "SOT23-JL" SOT23-JL 1094.41,1668.11 r0 top
Q2 "Q-IR-RECIVER/HS0038B-JL" Q-IR-RECIVER/HS0038B-JL 2824.41,238.11 r0 top
Q4 "SOT23-JL" SOT23-JL 2254.41,4538.11 r90 bottom
R1 "0603-JL" 0603-JL 2174.41,4918.11 r0 top
R2 "0603-JL" 0603-JL 539.41,448.11 r0 top
R3 "0603-JL" 0603-JL 664.41,448.11 r0 top
R4 "0603-JL" 0603-JL 789.41,448.11 r0 top
R5 "0603-JL" 0603-JL 689.41,1668.11 r90 top
R6 "0603-JL" 0603-JL 3149.41,578.11 r180 top
R7 "0603-JL" 0603-JL 1294.41,1663.11 r0 top
R8 "0603-JL" 0603-JL 3309.41,578.11 r180 top
R9 "0603-JL" 0603-JL 249.41,5213.11 r270 top
R10 "0603-JL" 0603-JL 5949.41,3478.11 r180 bottom
R11 "0603-JL" 0603-JL 3469.41,578.11 r180 top
R12 "0603-JL" 0603-JL 5344.41,3588.11 r270 bottom
R13 "0603-JL" 0603-JL 1354.41,1798.11 r180 top
R14 "0603-JL" 0603-JL 4259.41,618.11 r90 top
R15 "0603-JL" 0603-JL 819.41,763.11 r270 top
R16 "0603-JL" 0603-JL 1654.41,548.11 r180 top
R17 "0603-JL" 0603-JL 2754.41,378.11 r270 top
R18 "0603-JL" 0603-JL 5784.41,528.11 r90 top
R19 "0603-JL" 0603-JL 4104.41,618.11 r90 top
R20 "0603-JL" 0603-JL 4284.41,1038.11 r0 top
R21 "0603-JL" 0603-JL 4284.41,1108.11 r0 top
R22 "0603-JL" 0603-JL 3639.41,618.11 r90 top
R23 "0603-JL" 0603-JL 3009.41,733.11 r270 top
R24 "0603-JL" 0603-JL 3154.41,4828.11 r90 top
R25 "0603-JL" 0603-JL 4764.41,4183.11 r270 top
R26 "0603-JL" 0603-JL 1164.41,3363.11 r90 top
R27 "0603-JL" 0603-JL 804.41,3543.11 r0 top
R28 "0603-JL" 0603-JL 804.41,3618.11 r0 top
R29 "0603-JL" 0603-JL 5199.41,3588.11 r270 bottom
R30 "0603-JL" 0603-JL 4874.41,3013.11 r90 top
R31 "0603-JL" 0603-JL 5949.41,3548.11 r0 bottom
R32 "0603-JL" 0603-JL 4874.41,2888.11 r270 top
R33 "0603-JL" 0603-JL 5484.41,3588.11 r270 bottom
R34 "0603-JL" 0603-JL 5414.41,3588.11 r270 bottom
R35 "0603-JL" 0603-JL 5639.41,1348.11 r0 top
R36 "0603-JL" 0603-JL 1464.41,448.11 r0 top
R37 "0603-JL" 0603-JL 1629.41,2798.11 r180 bottom
R38 "0603-JL" 0603-JL 4674.41,4268.11 r90 top
R39 "0603-JL" 0603-JL 3794.41,618.11 r90 top
R40 "0603-JL" 0603-JL 1439.41,2828.11 r90 bottom
R41 "0603-JL" 0603-JL 1364.41,2828.11 r90 bottom
R42 "0603-JL" 0603-JL 5844.41,3478.11 r270 bottom
R43 "0603-JL" 0603-JL 2159.41,1398.11 r90 top
R44 "0603-JL" 0603-JL 4599.41,5183.11 r90 bottom
R45 "0603-JL" 0603-JL 1699.41,3068.11 r90 bottom
R46 "0603-JL" 0603-JL 519.41,808.11 r270 top
R47 "0603-JL" 0603-JL 2154.41,4528.11 r270 bottom
R48 "0603-JL" 0603-JL 1514.41,4673.11 r270 top
R49 "0603-JL" 0603-JL 1584.41,4673.11 r270 top
R50 "0603-JL" 0603-JL 1654.41,4673.11 r270 top
R51 "0603-JL" 0603-JL 1744.41,4818.11 r180 bottom
R52 "0603-JL" 0603-JL 789.41,3218.11 r0 top
R53 "0603-JL" 0603-JL 789.41,3143.11 r0 top
R54 "0603-JL" 0603-JL 789.41,3388.11 r0 top
R55 "0603-JL" 0603-JL 289.41,813.11 r270 top
R56 "0603-JL" 0603-JL 789.41,3313.11 r0 top
R57 "0603-JL" 0603-JL 5274.41,3588.11 r270 bottom
R58 "0603-JL" 0603-JL 1834.41,3033.11 r0 bottom
R59 "0603-JL" 0603-JL 1594.41,2398.11 r270 top
R60 "0603-JL" 0603-JL 1619.41,2523.11 r0 top
R61 "0603-JL" 0603-JL 6179.41,4998.11 r270 top
R62 "0603-JL" 0603-JL 6249.41,4998.11 r90 top
R63 "0603-JL" 0603-JL 5304.41,4928.11 r180 top
R64 "0603-JL" 0603-JL 6389.41,4998.11 r90 top
R65 "0603-JL" 0603-JL 2084.41,1398.11 r270 top
R66 "0603-JL" 0603-JL 319.41,1528.11 r270 bottom
R67 "0603-JL" 0603-JL 4259.41,4758.11 r180 top
R68 "0603-JL" 0603-JL 769.41,893.11 r180 top
R69 "0603-JL" 0603-JL 1654.41,628.11 r180 top
R70 "0603-JL" 0603-JL 2339.41,4633.11 r0 bottom
R71 "0603-JL" 0603-JL 1694.41,2453.11 r0 top
R72 "0603-JL" 0603-JL 3709.41,618.11 r270 top
R73 "0603-JL" 0603-JL 224.41,3933.11 r180 top
R74 "0603-JL" 0603-JL 2319.41,2548.11 r180 bottom
R75 "0603-JL" 0603-JL 1154.41,2328.11 r0 top
R76 "0603-JL" 0603-JL 1674.41,2153.11 r180 bottom
R77 "0603-JL" 0603-JL 1799.41,2153.11 r0 bottom
R78 "0603-JL" 0603-JL 1044.41,2398.11 r90 top
R79 "0603-JL" 0603-JL 1449.41,2398.11 r270 top
R80 "0603-JL" 0603-JL 3719.41,5178.11 r0 bottom
R81 "0603-JL" 0603-JL 769.41,1668.11 r90 top
R82 "0603-JL" 0603-JL 1254.41,1773.11 r90 top
R83 "0603-JL" 0603-JL 1139.41,1818.11 r90 top
R84 "0603-JL" 0603-JL 349.41,548.11 r0 top
R85 "0603-JL" 0603-JL 3949.41,618.11 r90 top
R86 "0603-JL" 0603-JL 1069.41,1818.11 r90 top
R87 "0603-JL" 0603-JL 6319.41,4998.11 r270 top
R88 "0603-JL" 0603-JL 1044.41,2723.11 r270 top
R89 "0603-JL" 0603-JL 974.41,2723.11 r270 top
R90 "0603-JL" 0603-JL 799.41,2478.11 r0 top
R91 "0603-JL" 0603-JL 799.41,2403.11 r0 top
R92 "0603-JL" 0603-JL 799.41,2663.11 r0 top
R93 "0603-JL" 0603-JL 799.41,2593.11 r0 top
R94 "0603-JL" 0603-JL 999.41,1818.11 r90 top
R95 "0603-JL" 0603-JL 1524.41,2398.11 r90 top
R96 "0603-JL" 0603-JL 1449.41,1963.11 r90 bottom
R97 "0603-JL" 0603-JL 1364.41,1963.11 r90 bottom
R98 "0603-JL" 0603-JL 1259.41,548.11 r180 top
R99 "0603-JL" 0603-JL 4969.41,943.11 r90 top
R100 "0603-JL" 0603-JL 5114.41,943.11 r270 top
R101 "0603-JL" 0603-JL 1079.41,448.11 r0 top
R102 "0603-JL" 0603-JL 1259.41,628.11 r180 top
R103 "0603-JL" 0603-JL 4174.41,618.11 r270 top
R104 "0603-JL" 0603-JL 4134.41,4683.11 r180 top
R105 "0603-JL" 0603-JL 4329.41,618.11 r270 top
R106 "0603-JL" 0603-JL 3224.41,4828.11 r270 top
R107 "0603-JL" 0603-JL 5964.41,4998.11 r270 top
R108 "0603-JL" 0603-JL 5894.41,4998.11 r90 top
R109 "0603-JL" 0603-JL 3719.41,5248.11 r180 bottom
R110 "0603-JL" 0603-JL 4019.41,618.11 r270 top
R111 "0603-JL" 0603-JL 1744.41,4743.11 r180 bottom
R112 "0603-JL" 0603-JL 1744.41,4668.11 r180 bottom
R113 "0603-JL" 0603-JL 5099.41,2648.11 r180 top
R114 "0603-JL" 0603-JL 2964.41,5063.11 r0 top
R115 "0603-JL" 0603-JL 4444.41,5023.11 r0 bottom
R116 "0603-JL" 0603-JL 1299.41,2418.11 r180 top
R117 "0603-JL" 0603-JL 1159.41,2418.11 r180 top
R118 "0603-JL" 0603-JL 3469.41,648.11 r0 top
R119 "0603-JL" 0603-JL 3309.41,648.11 r0 top
R120 "0603-JL" 0603-JL 3149.41,648.11 r0 top
R121 "0603-JL" 0603-JL 3864.41,618.11 r270 top
R122 "0603-JL" 0603-JL 1654.41,708.11 r0 top
R123 "0603-JL" 0603-JL 1654.41,798.11 r0 top
R124 "0603-JL" 0603-JL 2344.41,1858.11 r270 top
R125 "0603-JL" 0603-JL 2259.41,1993.11 r0 top
R126 "0603-JL" 0603-JL 5824.41,4998.11 r270 top
R127 "0603-JL" 0603-JL 244.41,1528.11 r90 bottom
R128 "0603-JL" 0603-JL 5564.41,3588.11 r270 bottom
R129 "0603-JL" 0603-JL 5289.41,528.11 r90 top
R131 "0603-JL" 0603-JL 2449.41,2548.11 r180 bottom
R132 "0603-JL" 0603-JL 2114.41,2058.11 r180 top
R133 "0603-JL" 0603-JL 5039.41,943.11 r90 top
R134 "0603-JL" 0603-JL 2069.41,1988.11 r0 top
R135 "0603-JL" 0603-JL 5184.41,943.11 r270 top
R136 "0603-JL" 0603-JL 5089.41,1468.11 r90 top
R137 "0603-JL" 0603-JL 3849.41,1163.11 r90 top
R138 "0603-JL" 0603-JL 2449.41,453.11 r90 bottom
R139 "0603-JL" 0603-JL 2364.41,453.11 r90 bottom
R140 "0603-JL" 0603-JL 3779.41,1163.11 r90 top
R141 "0603-JL" 0603-JL 6034.41,4998.11 r90 top
R142 "0603-JL" 0603-JL 2029.41,1603.11 r270 top
R143 "0603-JL" 0603-JL 2029.41,1733.11 r270 top
R144 "0603-JL" 0603-JL 5354.41,4518.11 r90 top
R145 "0603-JL" 0603-JL 6334.41,5048.11 r270 bottom
R146 "0603-JL" 0603-JL 6194.41,5048.11 r270 bottom
R147 "0603-JL" 0603-JL 6264.41,5048.11 r270 bottom
R148 "0603-JL" 0603-JL 6404.41,5048.11 r270 bottom
R149 "0603-JL" 0603-JL 3359.41,1768.11 r0 top
R150 "0603-JL" 0603-JL 6104.41,4998.11 r90 top
R151 "0603-JL" 0603-JL 1259.41,708.11 r0 top
R152 "0603-JL" 0603-JL 1259.41,788.11 r0 top
R153 "0603-JL" 0603-JL 5869.41,4248.11 r90 top
R154 "0603-JL" 0603-JL 6119.41,4218.11 r180 top
R155 "0603-JL" 0603-JL 6009.41,4463.11 r90 top
R156 "0603-JL" 0603-JL 6269.41,4418.11 r90 top
R157 "0603-JL" 0603-JL 6044.41,4603.11 r270 top
R158 "0603-JL" 0603-JL 6084.41,4463.11 r90 top
R159 "0603-JL" 0603-JL 6199.41,4418.11 r90 top
R160 "0603-JL" 0603-JL 1649.41,2053.11 r180 bottom
R161 "0603-JL" 0603-JL 6049.41,523.11 r90 top
R162 "0603-JL" 0603-JL 5979.41,523.11 r90 top
R163 "0603-JL" 0603-JL 2904.41,438.11 r0 top
R164 "0603-JL" 0603-JL 6629.41,4973.11 r270 bottom
R166 "0603-JL" 0603-JL 6509.41,903.11 r180 top
S1 "K-SWITCH/6X6MM/SMD" K-SWITCH/6X6MM/SMD 3114.41,148.11 r270 top
S2 "K-SWITCH/6X6MM/SMD" K-SWITCH/6X6MM/SMD 3469.41,148.11 r270 top
S3 "K-SWITCH/6X6MM/SMD" K-SWITCH/6X6MM/SMD 3824.41,148.11 r270 top
S4 "K-SWITCH/6X6MM/SMD" K-SWITCH/6X6MM/SMD 24.41,393.11 r90 top
S5 "5-KEY-SMD" 5-KEY-SMD 4219.41,-31.89 r45 top
S6 "O-SW/SS-12F45" O-SW/SS-12F45 439.41,5228.11 r0 top
U1 "SO8N-JL" SO8N-JL 1464.41,673.11 r180 top
U2 "QFN32-0.5-JL" QFN32-0.5-JL 5284.41,1218.11 r270 top
U3 "SOP48-0.5/NAND_FLASH" SOP48-0.5/NAND_FLASH 6079.41,3473.11 r270 top
U4 "SO8N-JL" SO8N-JL 664.41,678.11 r180 top
U5 "SOT223-JL" SOT223-JL 6524.41,1553.11 r90 top
U6 "U-SI4730-QFN-20P-0.5" U-SI4730-QFN-20P-0.5 4597.95,332.36 r90 top
U7 "SOT223-JL" SOT223-JL 919.41,4103.11 r0 top
U8 "SOP56-0.5/W-JL" SOP56-0.5/W-JL 4284.41,3703.11 r90 top
U9 "SOP48-0.5/W-JL" SOP48-0.5/W-JL 4219.41,2848.11 r0 top
U10 "SO8N-JL" SO8N-JL 4249.41,898.11 r270 top
U11 "QFP48-0.5-JL" QFP48-0.5-JL 1354.41,2108.11 r90 top
U12 "U-LQFP176-0.5" U-LQFP176-0.5 2854.41,2773.11 r0 top
U13 "SO8N-W-JL" SO8N-W-JL 4434.41,4313.11 r90 top
U14 "QFP48-0.5-JL" QFP48-0.5-JL 1359.41,3123.11 r90 top
U15 "SO16N-JL" SO16N-JL 834.41,1358.11 r90 top
U16 "U-DS18B20/2.54/3P" U-DS18B20/2.54/3P 3884.41,4938.11 r180 top
U17 "SOP16-0.65-JL" SOP16-0.65-JL 2189.41,1758.11 r0 top
U18 "WSOF6I" WSOF6I 6554.41,5003.11 r180 top
U19 "SO8N-JL" SO8N-JL 1079.41,678.11 r180 top
U20 "QFN24-0.5-JL" QFN24-0.5-JL 5809.41,4458.11 r0 top
U21 "LPCC-16-0.5" LPCC-16-0.5 6229.41,4643.11 r90 top
U22 "U-DHT11/2.54/4P" U-DHT11/2.54/4P 4274.41,4938.11 r180 top
U23 "SO8N-JL" SO8N-JL 964.41,4878.11 r0 top
U24 "BMP085" BMP085 6634.41,1093.11 r180 top
U27 "SOT23-JL" SOT23-JL 5499.41,4558.11 r90 top
X1 "XTAL/MC-306/3.8X8MM" XTAL/MC-306/3.8X8MM 4594.41,753.11 r90 top
X2 "X-1105/A-JL" X-1105/A-JL 2939.41,1758.11 r270 top
X3 "XTAL/MC-306/3.8X8MM" XTAL/MC-306/3.8X8MM 2574.41,1818.11 r270 top
X4 "X-0705/7X5MM" X-0705/7X5MM 1234.41,2588.11 r180 top
X5 "X-1105/A-JL" X-1105/A-JL 1229.41,3543.11 r0 top
X6 "X-0705/7X5MM" X-0705/7X5MM 5294.41,4738.11 r90 top

## Footprints (in the part's own frame and the unit in brackets; to place one, negate y for a bottom-side part, rotate by r counter-clockwise, add the part's x,y. Pads: shape width x height; smd on the part's side, far side on the other; paste and mask are expansions set on the pad)
5-KEY-SMD [mm]
  rect 1x1.6 smd: 1(2.3,0)
  oval 1x1.6 smd: 2(3.7,0) 3(5.1,0) 4(5.1,7.4) 5(3.7,7.4) 6(2.3,7.4)
  round 0.5 hole 0.8 unplated: 7(2.1,3.7)
  round 0.5 hole 1 unplated: 8(5.6,3.7)
  silkscreen extent 0,0 7.4,7.4
0603-JL [mm]
  rect 0.787x1.11 smd: 1(-0.761,0) 2(0.761,0)
  silkscreen extent -1.6,-0.9 1.6,0.9
0603/A-JL [mm]
  rect 0.787x1.11 smd: 1(-0.761,0) 2(0.761,0)
  silkscreen extent -1.6,-0.9 1.6,0.9
0805/A-JL [mil]
  rect 50x50 smd: 1(-45,0) 2(45,0)
  silkscreen extent -90,-43 91,43
6032C-JL [mil]
  rect 90x120 smd: 1(120,0) 2(-120,0)
  silkscreen extent -126,-98 126,98
ANT-38X8X5.5 [mm]
  round 1.3 hole 0.7: 1(0,0) 2(48,0)
  silkscreen extent 1.27,-4.5 46.5,4.5
ANT-FM(23X5) [mm]
  round 1.3 hole 0.7: 1(0,0) 2(46,0) 3(31,0)
  silkscreen extent 1.27,-4.5 44.7,4.5
B-MIC-6MM [mm]
  rect 1.2x1.2 hole 0.5: 1(-1,-1)
  round 1.2 hole 0.5: 2(1,-1)
  silkscreen extent -3.79,-3 3,3
BAT-CEDN [mm]
  rect 3.81x2 smd: 1(8.636,0) 2(-8.636,0)
  round 0 hole 1.5 unplated: 3(3.75,0)
  round 0 hole 1.3 unplated: 4(-3.75,0)
  silkscreen extent -7.58,-7.58 7.87,7.58
BMP085 [mm]
  rect 2.2x0.8 smd: 1(-2.2,1.27)
  oval 2.2x0.8 smd: 2(-2.2,0) 3(-2.2,-1.27) 5(2.2,-1.27) 6(2.2,0) 7(2.2,1.27)
  oval 0.8x2.2 smd: 4(0,-2.2)
  oval 0.8x3 smd: 8(0,1.9)
  silkscreen extent -3.6,-2.5 2.5,2.71
C-6.6X6.6MM [mm]
  rect 3x1.5 smd: 1(-3.2,0) 2(3.2,0)
  silkscreen extent -3.3,-3.3 3.3,3.3
C-8.4X8.4MM [mm]
  rect 4x1.524 smd: 1(-3.2,0)
  rect 4x1.5 smd: 2(3.2,0)
  silkscreen extent -4.2,-4.2 4.2,4.2
C-0805 [mil]
  rect 50x50 smd: 1(-45,0) 2(45,0)
  silkscreen extent -90,-43 91,43
CON-2P/2.54/SC [mil]
  rect 60x60 hole 36: 1(0,0)
  round 60 hole 36: 2(100,0)
  silkscreen extent -70,-295 150,49
CON-8X2P/2.54/TC/OLED [mil]
  rect 60x60 / inner round 60 / far side round 60 hole 40: 1(350,-50)
  round 60 hole 40: 2(350,50) 3(250,-50) 4(250,50) 5(150,-50) 6(150,50) 7(50,-50) 8(50,50) 9(-50,-50) 10(-50,50) 11(-150,-50) 12(-150,50) 13(-250,-50) 14(-250,50) 16(-350,50)
  round 60 / inner rect 60x60 / far side rect 60x60 hole 40: 15(-350,-50)
  silkscreen extent -400,-100 445,100
CON-30P(2X15)/MAIN/2.54MM/TC [mil]
  rect 60x60 hole 40: 1(-700,-50)
  round 60 hole 40: 2(-700,50) 3(-600,-50) 4(-600,50) 5(-500,-50) 6(-500,50) 7(-400,-50) 8(-400,50) 9(-300,-50) 10(-300,50) 11(-200,-50) 12(-200,50) 13(-100,-50) 14(-100,50) 15(0,-50) 16(0,50) 17(100,-50) 18(100,50) 19(200,-50) 20(200,50) 21(300,-50) 22(300,50) 23(400,-50) 24(400,50) 25(500,-50) 26(500,50) 27(600,-50) 28(600,50) 29(700,-50) 30(700,50)
  silkscreen extent -782,-100 750,100
CON-DS210/SC/3-JL [mil]
  oval 90x170 hole 30 slot 110 at 90 deg: 1(0,0) 2(236.22,0)
  oval 170x90 hole 30 slot 110 at 0 deg: 3(118.11,196.85)
  silkscreen extent -1,-177 551,177
CON-HR911105C/RJ45/SC-JL [mm]
  oval 1.3x1.5 hole 0.914: 1(0,0) 2(1.27,2.54) 3(2.54,0) 4(3.81,2.54) 5(5.08,0) 6(6.35,2.54) 7(7.62,0) 8(8.89,2.54)
  round 1.8 hole 1.04: 9(-2.18,-11.25) 10(0.36,-11.25) 11(8.53,-11.25) 12(11.07,-11.25)
  round 2.5 hole 1.702: 13(-3.305,-3.48) 14(12.195,-3.48)
  round 2 hole 3.5 unplated: 15(10.16,-6.35) 16(-1.27,-6.35)
  silkscreen extent -3.34,-17.01 12.41,3.82
CON-JH-9P/SC/R-JL [mil]
  rect 70x70 hole 40: 1(216.14,0)
  round 70 hole 40: 2(107.87,0) 3(0,0) 4(-107.87,0) 5(-216.14,0) 6(161.81,-111.81) 7(53.94,-111.81) 8(-53.94,-111.81) 9(-161.81,-111.81)
  oval 190x102.36 hole 39.37 slot 125.98 at 0 deg: 10(-491.93,-55.91) 11(491.93,-55.91)
  Top pour cut-out: -612.17,-412.52 610.39,-412.52 610.39,-437.72 -612.17,-437.72 -612.17,-412.52
  silkscreen extent -607,-670 606,70
CON-KF128-2P/5.0/TC [mm]
  round 2.54 / inner rect 2.54x2.54 / far side rect 2.54x2.54 hole 1.2: 1(-2.5,0)
  round 2.54 hole 1.2: 2(2.5,0)
  silkscreen extent -5,-5 5,5.4
CON-KF2510/5P/2.54MM/TC [mil]
  rect 60x60 hole 36: 1(200,0)
  round 60 hole 36: 2(100,0) 3(0,0) 4(-100,0) 5(-200,0)
  silkscreen extent -250,-128 275,100
CON-MICRO-USB-B/5P [mm]
  rect 1.35x0.4 smd: 1(0.525,1.3)
  oval 1.35x0.4 smd: 2(0.525,0.65) 3(0.525,0) 4(0.525,-0.65) 5(0.525,-1.3)
  rect 1.9x1.9 smd: 6(-2.15,3.95) 7(-2.15,-3.95)
  round 0.5 hole 0.55 unplated: 8(0,2) 9(0,-2)
  silkscreen extent -4.93,-4.05 1.91,4.05
CON-PJ327A/SB-JL [mm]
  rect 1.8x3 smd: 1(3.35,-3.5)
  rect 1.5x3 smd: 2(-3.65,-3.5) 3(-4.65,3.5) 4(-1.05,3.5) 5(5.05,3.5)
  round 1.15 hole 1.2 unplated: 6(-3.25,0) 7(2.75,0)
  silkscreen extent -8.25,-3 5.75,3
CON-PS/2 [mil]
  round 60 hole 37: 1(51.18,-98.43) 2(-51.18,-98.43) 3(133.86,-98.43) 4(-133.86,-98.43) 5(133.86,0) 6(-133.86,0)
  oval 66.93x125.98 hole 27.56 slot 86.61 at 90 deg: 7(-275.59,-216.54) 8(275.59,-216.54)
  round 118 hole 90: 9(0,-248.03)
  silkscreen extent -276,-433 276,71
CON-RE-3P/2.54/TC [mil]
  rect 60x60 hole 36: 1(0,0)
  round 60 hole 36: 2(100,0) 3(200,0)
  silkscreen extent -70,-50 250,49
CON-RE-3P/2.54/TCA [mil]
  rect 60x60 hole 36: 1(0,0)
  round 60 hole 36: 2(100,0) 3(200,0)
  silkscreen extent -50,-50 250,49
CON-RF-6X2P/2.54/TC(F4-DSO) [mil]
  rect 60x60 hole 40: 1(-250,0)
  round 60 hole 40: 2(-250,100) 3(-150,0) 4(-150,100) 5(-50,0) 6(-50,100) 7(50,0) 8(50,100) 9(150,0) 10(150,100) 11(250,0) 12(250,100)
  round 157.48 hole 78.74: 13(400,50) 14(-400,50)
  silkscreen extent -320,-50 300,150
CON-TFCARD/AUTO-EJECT [mm]
  rect 0.75x1.6 smd: 1(7.2,10.5) 2(6.1,10.5) 3(5,10.5) 4(3.9,10.5) 5(2.8,10.5) 6(1.7,10.5) 7(0.6,10.5) 8(-0.5,10.5) 9(-1.6,10.5)
  rect 1.2x1.4 smd: 10(-2.8,10)
  rect 1.2x2.2 smd: 11(-2.8,0.4) 12(12.7,0.4)
  rect 1.6x1.4 smd: 13(11.8,10)
  round 0.95 hole 0.95 unplated: 14(8,0) 15(0,0)
  silkscreen extent -2.4,-4 12.3,10.5
CON-USB-A-4P(SIDE) [mm]
  round 1.575 hole 0.92: 1(3,0) 2(1,0) 3(-1,0) 4(-3,0)
  round 2.5 hole 1.5: 5(-3.5,2.7) 6(3.5,2.7) 7(3.5,-2.7) 8(-3.5,-2.7)
  silkscreen extent -4.25,-3.6 15.15,3.6
K-SWITCH/6X6MM/SMD [mm]
  rect 1.6x0.8 smd: 1(-4.7,2.25) 2(4.7,2.25) 3(-4.7,-2.25) 4(4.7,-2.25)
  silkscreen extent -3,-3 3,3
L-3530/B-JL [mm]
  rect 1.6x3.4 smd: 1(-1.5,0) 2(1.5,0)
  silkscreen extent -2.71,-2.24 2.67,2.24
L-SMT-7X7 [mil]
  rect 118.11x80 smd: 1(-110,0) 2(110,0)
  silkscreen extent -138,-138 138,138
LED-0603/AI-JL [mm]
  rect 0.787x1.11 smd: 1(-0.761,0) 2(0.761,0)
  silkscreen extent -1.2,-0.8 1.4,0.8
LPCC-16-0.5 [mm]
  rect 0.45x0.3 smd: 1(-1.275,0.75) 2(-1.275,0.25) 3(-1.275,-0.25) 4(-1.275,-0.75) 9(1.275,-0.75) 10(1.275,-0.25) 11(1.275,0.25) 12(1.275,0.75)
  rect 0.3x0.45 smd: 5(-0.75,-1.275) 6(-0.25,-1.275) 7(0.25,-1.275) 8(0.75,-1.275) 13(0.75,1.275) 14(0.25,1.275) 15(-0.25,1.275) 16(-0.75,1.275)
  silkscreen extent -2.1,-1.5 1.5,1.5
MODULE-AD7606/30P(2X15)/2.54MM/TC [mil]
  rect 60x60 hole 40: 1(-700,-50)
  round 60 hole 40: 2(-700,50) 3(-600,-50) 4(-600,50) 5(-500,-50) 6(-500,50) 7(-400,-50) 8(-400,50) 9(-300,-50) 10(-300,50) 11(-200,-50) 12(-200,50) 13(-100,-50) 14(-100,50) 15(0,-50) 16(0,50) 17(100,-50) 18(100,50) 19(200,-50) 20(200,50) 21(300,-50) 22(300,50) 23(400,-50) 24(400,50) 25(500,-50) 26(500,50) 27(600,-50) 28(600,50) 29(700,-50) 30(700,50) 31(-200,1000) 32(-200,900)
  silkscreen extent -782,-100 750,100
MODULE-AW8733 [mil]
  rect 60x60 hole 30: 1(850,-400)
  round 60 hole 30: 2(850,-300) 3(-850,400) 4(-850,300) 5(-850,200)
  silkscreen extent -900,-475 900,450
MODULE-CAMMER/16P(2X8)/2.54/TC [mil]
  rect 65x65 hole 41: 1(0,0)
  round 65 hole 41: 2(0,100) 3(100,0) 4(100,100) 5(200,0) 6(200,100) 7(300,0) 8(300,100) 9(400,0) 10(400,100) 11(500,0) 12(500,100) 13(600,0) 14(600,100) 15(700,0) 16(700,100)
  silkscreen extent -75,-50 750,150
MODULE-GPS/2X3P/2.54MM/TC [mil]
  rect 60x60 hole 40: 1(-100,-50)
  round 60 hole 40: 2(-100,50) 3(0,-50) 4(0,50) 5(100,-50) 6(100,50)
  silkscreen extent -175,-102 150,102
MODULE-MG323/2X4P/2.54MM/TC [mil]
  rect 60x60 hole 40: 1(-150,-50)
  round 60 hole 40: 2(-150,50) 3(-50,-50) 4(-50,50) 5(50,-50) 6(50,50) 7(150,-50) 8(150,50)
  silkscreen extent -225,-102 196,102
MODULE-NRF24L01/2X4P/2.54MM/TC [mil]
  rect 60x60 hole 40: 1(0,0)
  round 60 hole 40: 2(0,100) 3(100,0) 4(100,100) 5(200,0) 6(200,100) 7(300,0) 8(300,100)
  silkscreen extent -75,-52 346,152
MODULE-NRF905/14P(2X7)/2.54/TC [mil]
  rect 60x60 hole 40: 1(-300,0)
  round 60 hole 40: 2(-300,100) 3(-200,0) 4(-200,100) 5(-100,0) 6(-100,100) 7(0,0) 8(0,100) 9(100,0) 10(100,100) 11(200,0) 12(200,100) 13(300,0) 14(300,100)
  silkscreen extent -373,-50 350,150